# EAGLE board CortexM0_M3_BoB_1v (EAGLE 5.11)
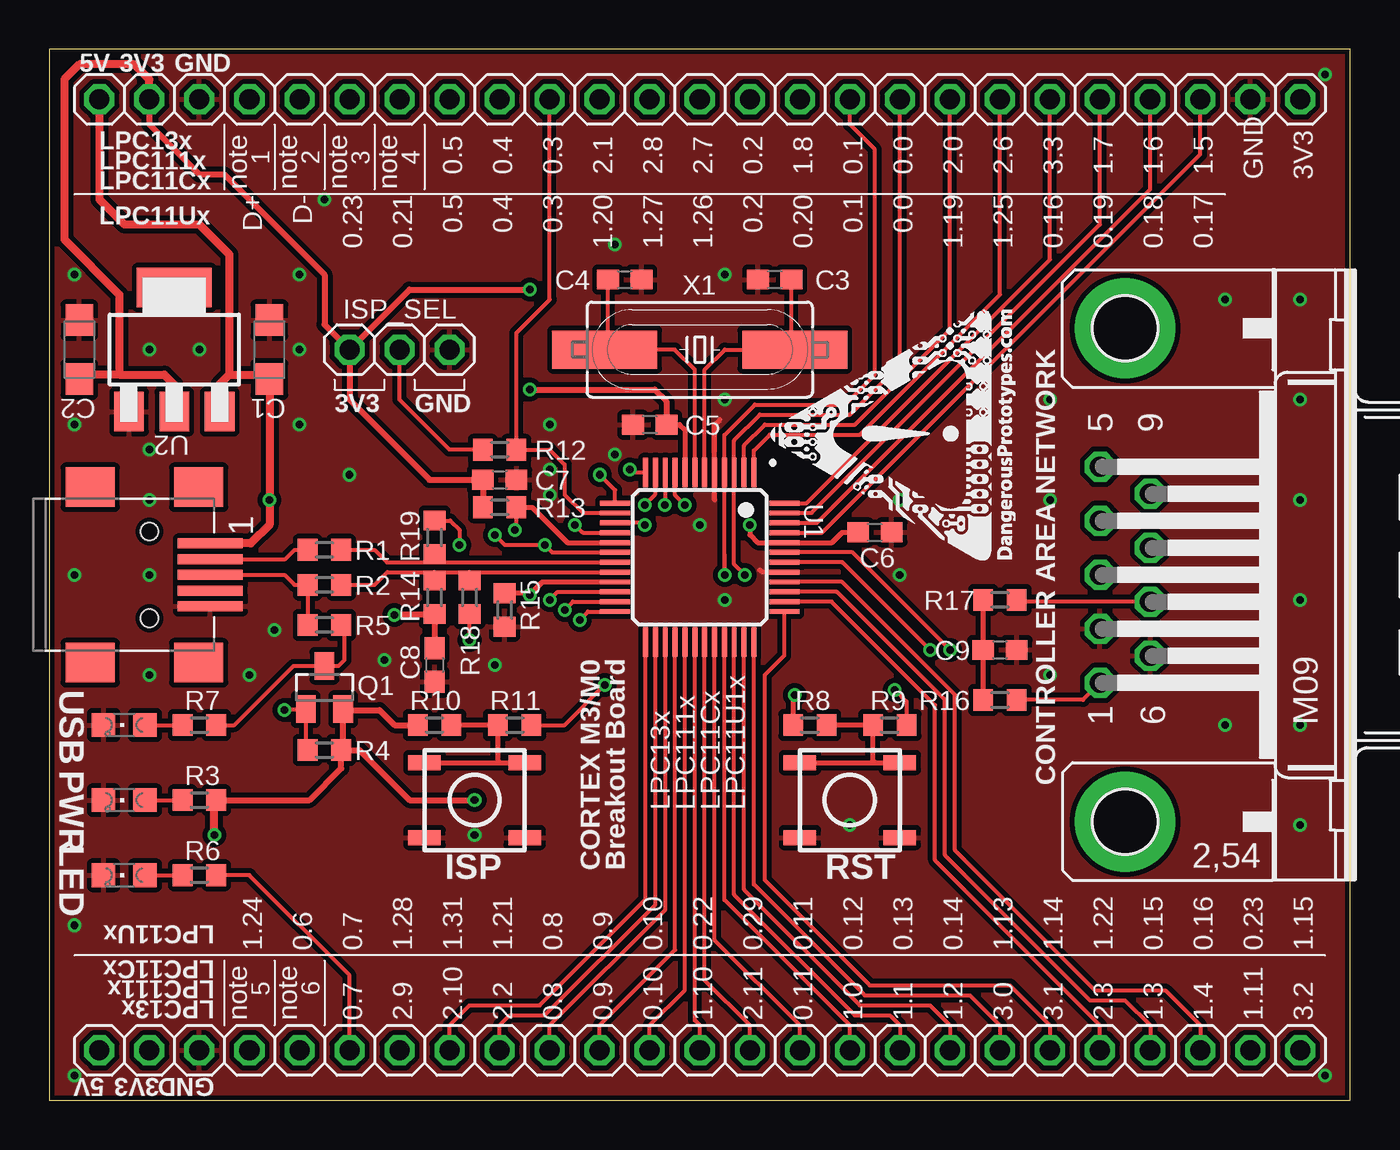
[diagram p0: board, top side]
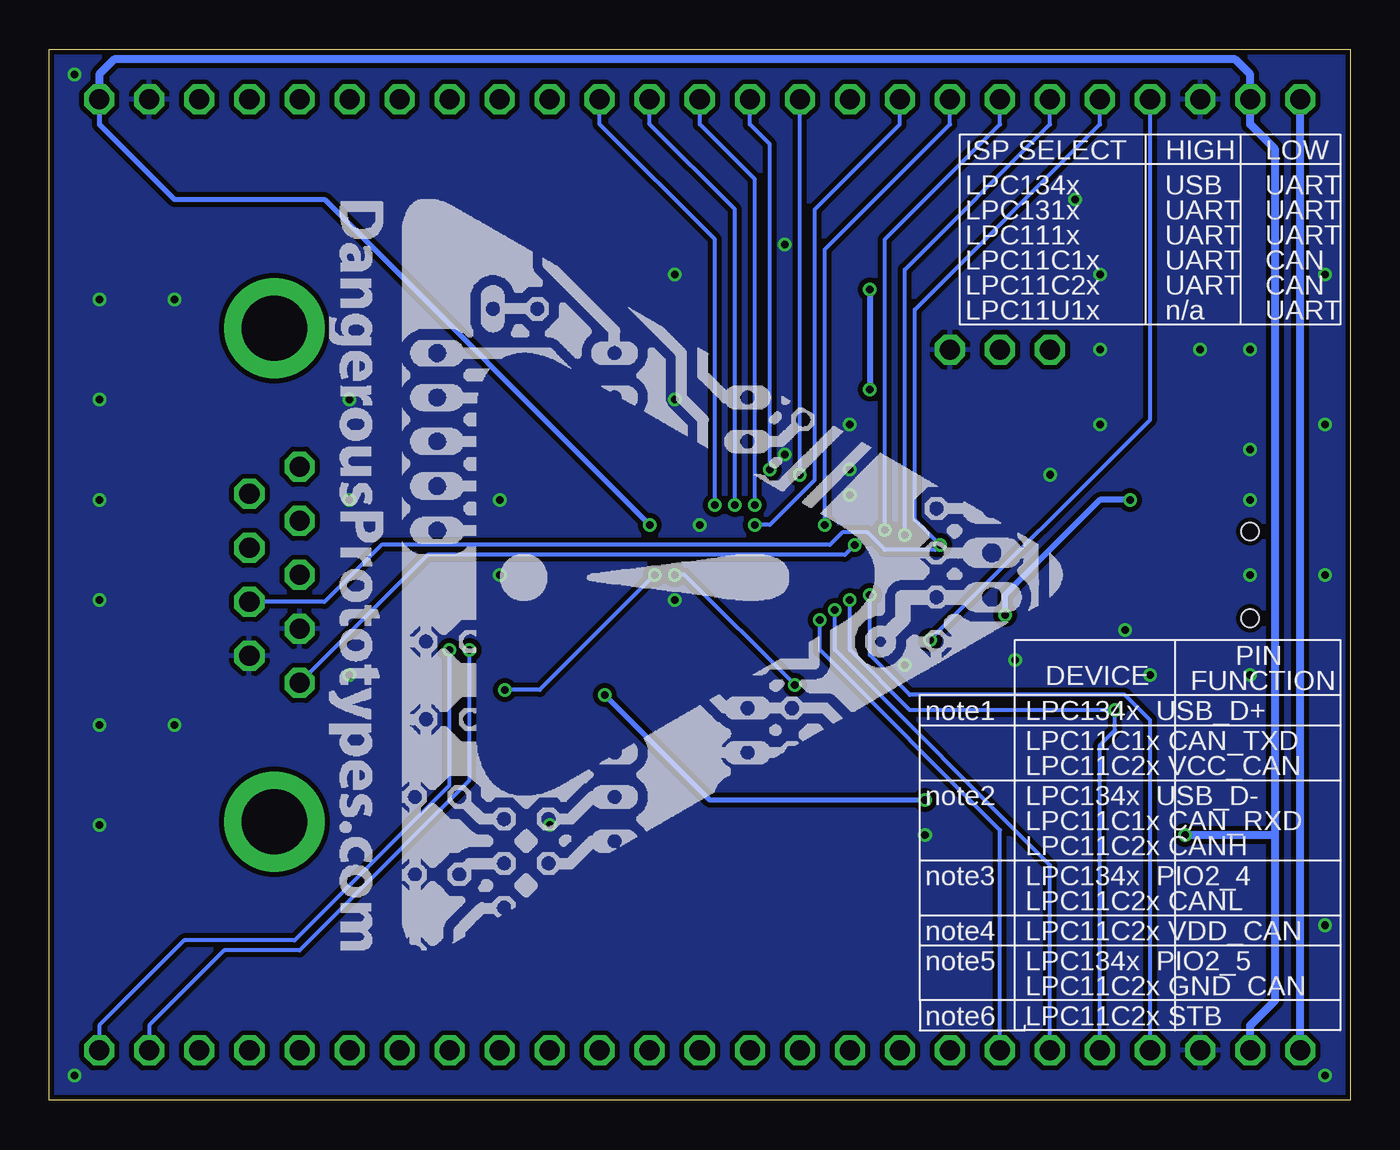
[diagram p1: board, bottom side, seen from below]

Size 66.04 x 53.34 mm. Coordinates in mm from the lower left corner, seen from the top.
Outline: 0,0 66.04,0 66.04,53.34 0,53.34 0,0
Copper layers (1*16): Top 0.035mm / dielectric 1.5mm / Bottom 0.035mm
Design rules "Fusion_eagle_rule_v1.1": minimum track width 6mil, minimum drill 12mil, track to track 6mil, track to pad 6mil, pad to pad 6mil, via to via 6mil, smd to smd 0mil, copper to edge 10mil, drill to drill 10mil, minimum pad ring 10mil, minimum via ring 6mil, stop-mask expansion 2mil, vias tented up to drill 100mil, thermal gap 10mil

## Footprints (pad centres in the part's own frame; a part is rotated, then mirrored left to right if it is on the bottom)
SMC_A = smd 1.6 x 1.4: + -1.5,0; - 1.5,0
C603 = smd 1.1 x 1: 1 -0.85,0; 2 0.85,0
M09HP = drill 1.016 octagon: 1 -5.486,1.27; 2 -2.743,1.27; 3 0,1.27; 4 2.743,1.27; 5 5.486,1.27; 6 -4.115,-1.27; 7 -1.372,-1.27; 8 1.372,-1.27; 9 4.115,-1.27 | drill 3.302 pad 5.08 round: G1 -12.522,0; G2 12.522,0
TACT_SWITCH_SMALL = smd 1.651 x 0.762: 1 -2.54,1.905; 2 2.54,1.905; 3 -2.54,-1.905; 4 2.54,-1.905
1X03 = drill 1.016 octagon: 1 -2.54,0; 2 0,0; 3 2.54,0
1X25 = drill 1.016 octagon: 1 -29.21,0; 2 -26.67,0; 3 -24.13,0; 4 -21.59,0; 5 -19.05,0; 6 -16.51,0; 7 -13.97,0; 8 -11.43,0; 9 -8.89,0; 10 -6.35,0; 11 -3.81,0; 12 -1.27,0; 13 1.27,0; 14 3.81,0; 15 6.35,0; 16 8.89,0; 17 11.43,0; 18 13.97,0; 19 16.51,0; 20 19.05,0; 21 21.59,0; 22 24.13,0; 23 26.67,0; 24 29.21,0; 25 31.75,0
LED-805 = smd 1.2 x 1.2: A 0,-1.05; C 0,1.05
SOT23 = smd 1 x 1.4: 1 -0.95,-1.1; 2 0.95,-1.1; 3 0,1.1
R603 = smd 1 x 1.1: 1 -0.85,0; 2 0.85,0
LQFP48 = smd 1.5 x 0.25: 1 -4.3,2.75; 2 -4.3,2.25; 3 -4.3,1.75; 4 -4.3,1.25; 5 -4.3,0.75; 6 -4.3,0.25; 7 -4.3,-0.25; 8 -4.3,-0.75; 9 -4.3,-1.25; 10 -4.3,-1.75; 11 -4.3,-2.25; 12 -4.3,-2.75; 25 4.3,-2.75; 26 4.3,-2.25; 27 4.3,-1.75; 28 4.3,-1.25; 29 4.3,-0.75; 30 4.3,-0.25; 31 4.3,0.25; 32 4.3,0.75; 33 4.3,1.25; 34 4.3,1.75; 35 4.3,2.25; 36 4.3,2.75 | smd 0.25 x 1.5: 13 -2.75,-4.3; 14 -2.25,-4.3; 15 -1.75,-4.3; 16 -1.25,-4.3; 17 -0.75,-4.3; 18 -0.25,-4.3; 19 0.25,-4.3; 20 0.75,-4.3; 21 1.25,-4.3; 22 1.75,-4.3; 23 2.25,-4.3; 24 2.75,-4.3; 37 2.75,4.3; 38 2.25,4.3; 39 1.75,4.3; 40 1.25,4.3; 41 0.75,4.3; 42 0.25,4.3; 43 -0.25,4.3; 44 -0.75,4.3; 45 -1.25,4.3; 46 -1.75,4.3; 47 -2.25,4.3; 48 -2.75,4.3
SOT223 = smd 1.5 x 2: 1 -2.3,-3.15; 2 0,-3.15; 3 2.3,-3.15 | smd 3.8 x 2: 4 0,3.15
CONN_USB_MINI-B = smd 2 x 2.5: BODY@1 -4.45,2.5; BODY@2 4.45,2.5; BODY@3 4.45,-3; BODY@4 -4.45,-3 | smd 0.5 x 3.3: D+ 0,3.1; D- -0.8,3.1; GND 1.6,3.1; ID 0.8,3.1; VUSB -1.6,3.1 | hole 0.9: -2.2,0; 2.2,0
HC-49U = smd 5.334 x 1.93: 1 -4.826,0; 2 4.826,0

## Placement (x,y rotation side)
C1  10uF  [SMC_A]  11.18,38.1 90 top
C2  10uF  [SMC_A]  1.52,38.1 90 top
C3  16pF  [C603]  36.83,41.66 180 top
C4  16pF  [C603]  29.21,41.66 0 top
C5  0.1uF  [C603]  30.48,34.29 180 top
C6  0.1uF  [C603]  41.91,28.83 0 top
C7  0.1uF  [C603]  22.86,31.5 0 top
C8  0.1uF  [C603]  19.56,22.1 270 top
C9  1nF  [C603]  48.26,22.86 0 top
CAN  [M09HP]  54.61,26.67 90 top
ISP  [TACT_SWITCH_SMALL]  21.59,15.24 180 top
ISP_SEL  [1X03]  17.78,38.1 180 top
JP2  [1X25]  31.75,2.54 0 top
JP3  [1X25]  31.75,50.8 0 top
LED  [LED-805]  3.81,11.43 90 top
PWR  [LED-805]  3.81,15.24 90 top
Q1  [SOT23]  13.97,20.96 0 top
R1  33  [R603]  13.97,27.94 0 top
R2  33  [R603]  13.97,26.16 0 top
R3  1k  [R603]  7.62,15.24 180 top
R4  10k  [R603]  13.97,17.78 180 top
R5  1.5k  [R603]  13.97,24.13 180 top
R6  1k  [R603]  7.62,11.43 0 top
R7  1k  [R603]  7.62,19.05 0 top
R8  22K  [R603]  38.61,19.05 180 top
R9  1k  [R603]  42.67,19.05 0 top
R10  22K  [R603]  19.56,19.05 180 top
R11  1k  [R603]  23.62,19.05 0 top
R12  10k  [R603]  22.86,33.02 0 top
R13  0R  [R603]  22.86,30.1 0 top
R14  0R  [R603]  19.56,25.53 90 top
R15  0R  [R603]  23.11,24.89 90 top
R16  60R  [R603]  48.26,20.32 0 top
R17  60R  [R603]  48.26,25.4 0 top
R18  0R  [R603]  21.34,25.53 90 top
R19  0R  [R603]  19.56,28.57 270 top
RST  [TACT_SWITCH_SMALL]  40.64,15.24 180 top
U1  LPC1XXX  [LQFP48]  33.02,27.56 270 top
U2  [SOT223]  6.35,38.1 0 top
U$2  DP_LOGO0.5X0.5  [DP_LOGO_ART_0.5X0.5]  49.02,27.43 90 top
U$7  DP_LOGO1.5X1.5  [DP_LOGO_ART_1.5X1.5]  51.82,45.72 270 bottom
USB  [LED-805]  3.81,19.05 90 top
USB1  CON-USB-MINI-BUSB1  [CONN_USB_MINI-B]  5.08,26.67 270 top
X1  12MHz  [HC-49U]  33.02,38.1 180 top

## Library data of the parts
C1-C9 ISP LED PWR Q1 R1-R19 RST U1 U2 U$2 U$7 USB USB1 X1 = dp_devices
CAN = con-subd; OC_FARNELL: unknown; OC_NEWARK: unknown
ISP_SEL JP2 JP3 = pinhead

## Nets
+3V3: C2.+ C5.1 C6.1 C7.1 ISP_SEL.3 JP2.2 JP3.2 JP3.25 Q1.2 R3.1 R4.1 R8.2 R10.2 R13.1 U1.8 U1.44 U2.2
+5V: C1.+ C8.1 JP2.1 JP3.1 R14.1 U2.3 USB1.VUSB
D+: R2.2 R14.2 R18.2 U1.20
D-: R1.2 R19.2 U1.19
GND: C1.- C2.- C3.2 C4.2 C5.2 C6.2 C7.2 C8.2 C9.2 CAN.2 CAN.6 ISP.1 ISP.2 ISP_SEL.1 JP2.3 JP3.3 JP3.24 LED.C PWR.C R15.1 RST.1 RST.2 U1.5 U1.41 U2.1 USB1.GND USB.C
N$1: LED.A R6.1
N$2: R1.1 USB1.D-
N$3: R2.1 R5.2 USB1.D+
N$4: PWR.A R3.2
N$5: R8.1 R9.1 RST.3 RST.4
N$6: Q1.3 R5.1 R7.2
N$7: R7.1 USB.A
N$8: ISP.3 ISP.4 R10.1 R11.1
N$9: ISP_SEL.2 R12.1
N$13: C9.1 R16.1 R17.1
PIO0_0: JP3.17 R9.2 U1.3
PIO0_1: JP3.16 R11.2 U1.4
PIO0_2: JP3.14 U1.10
PIO0_3: JP3.10 R12.2 U1.14
PIO0_4: JP3.9 U1.15
PIO0_5: JP3.8 U1.16
PIO0_6: JP2.5 Q1.1 R4.2 U1.22
PIO0_7: JP2.6 R6.2 U1.23
PIO0_8: JP2.10 U1.27
PIO0_9: JP2.11 U1.28
PIO0_10: JP2.12 U1.29
PIO0_11: JP2.15 U1.32
PIO1_0: JP2.16 U1.33
PIO1_1: JP2.17 U1.34
PIO1_2: JP2.18 U1.35
PIO1_3: JP2.22 U1.39
PIO1_4: JP2.23 U1.40
PIO1_5: JP3.23 U1.45
PIO1_6: JP3.22 U1.46
PIO1_7: JP3.21 U1.47
PIO1_8: JP3.15 U1.9
PIO1_9: JP3.7 R13.2 U1.17
PIO1_10: JP2.13 U1.30
PIO1_11: JP2.24 U1.42
PIO2_0: JP3.18 U1.2
PIO2_1: JP3.11 U1.13
PIO2_2: JP2.9 U1.26
PIO2_3: JP2.21 U1.38
PIO2_4: CAN.7 JP3.5 R17.2 R19.1
PIO2_5: JP3.4 R18.1
PIO2_6: JP3.19 U1.1
PIO2_7: JP3.13 U1.11
PIO2_8: JP3.12 U1.12
PIO2_9: JP2.7 U1.24
PIO2_10: JP2.8 U1.25
PIO2_11: JP2.14 U1.31
PIO3_0: JP2.19 U1.36
PIO3_1: JP2.20 U1.37
PIO3_2: JP2.25 U1.43
PIO3_3: JP3.20 U1.48
PIO3_4: CAN.1 JP3.6 R16.2 U1.18
PIO3_5: JP2.4 R15.2 U1.21
XTAL1: C3.1 U1.6 X1.1
XTAL2: C4.1 U1.7 X1.2

## Tracks (layer width: path | path; a pad name or v marks a point on that pad's centre or on a via)
+3V3  (via drill 0.38)
  Top 0.254: C5.1 32,34.29 32.27,34.02 U1.8 | C6.1 40.26,28.83 39.74,28.31 U1.44 35.95,28.31 35.56,28.7 v35.56,29.21 | R8.2 37.76,20.49 v37.85,20.57
  Top 0.305: R4.1 14.92,17.88 Q1.2 14.96,19.81 16.76,19.81 17.53,19.05 R10.2 | R4.1 14.82,16.85 13.21,15.24 R3.1 | R13.1 C7.1 19.3,31.5 15.24,35.56 ISP_SEL.3 | JP3.2 5.08,49.53 7.62,46.99 8.89,46.99 13.97,41.91 13.97,39.37 ISP_SEL.3 | C5.1 31.33,35.47 30.73,36.07 v24.38,36.07 | v24.38,41.15 18.29,41.15 ISP_SEL.3 | R4.1 15.75,17.78 18.29,15.24 v21.59,15.24
  Top 0.406: U2.2 6.35,36.32 5.84,36.83 3.56,36.83 | C2.+ 2.01,36.83 3.56,36.83 | 3.56,36.83 3.56,40.89 0.76,43.69 0.76,51.82 1.52,52.58 4.32,52.58 5.08,51.82 JP3.2 | v8.38,13.46 8.38,15.15 R3.1
  Bottom 0.254: v35.56,29.21 52.07,45.72 59.69,45.72 63.5,49.53 JP3.25 | v37.85,20.57 32.51,15.24 v21.59,15.24
  Bottom 0.305: v24.38,41.15 v24.38,36.07
  Bottom 0.406: 3.81,13.46 3.81,5.08 5.08,3.81 JP2.2 | 3.81,13.46 3.81,48.26 5.08,49.53 JP3.2 5.08,52.07 5.84,52.83 62.74,52.83 63.5,52.07 JP3.25 | 3.81,13.46 v8.38,13.46
+5V  (via drill 0.38)
  Top 0.305: C8.1 R14.1 17.57,24.68 v17.53,24.64
  Top 0.406: USB1.VUSB 10.24,28.27 11.18,29.21 v11.18,30.48 C1.+ 10.69,36.83 9.14,36.83 | U2.3 8.65,36.34 9.14,36.83 | 9.14,36.83 9.14,42.93 7.62,44.45 3.81,44.45 2.54,45.72 JP3.1
  Bottom 0.305: v17.53,24.64 17.53,25.65 12.7,30.48 v11.18,30.48
  Bottom 0.406: JP2.1 JP3.1
D+
  Top 0.203: R2.2 16.51,26.16 17.16,26.81 19.56,26.81 | 19.56,26.81 21.34,26.81 | 21.34,26.81 U1.20 | 19.56,26.81 R14.2 | 21.34,26.81 R18.2
D-
  Top 0.203: 19.56,27.31 17.14,27.31 16.51,27.94 R1.2 | 19.56,27.31 U1.19 | 19.56,27.31 R19.2
GND  (via drill 0.38)
  Top 0.254: U1.41 36.18,26.81 36.07,26.92 | 33.78,30.48 33.77,30.49 U1.5 33.77,34.28 34.04,34.54
  other vias: 25.4,32 25.4,30.73 1.27,1.27 64.77,1.27 64.77,52.07 28.7,32.77 25.4,34.29 1.27,41.91 1.27,34.29 5.08,38.1 7.62,38.1 5.08,33.02 5.08,30.48 5.08,26.67 5.08,21.59 10.16,21.59 11.43,23.88 1.27,26.67 12.7,38.1 12.7,34.29 12.7,41.91 15.24,31.75 13.97,45.72 21.59,13.46 40.64,13.97 34.29,35.56 33.02,29.21 34.29,41.91 28.7,43.43 43.18,26.67 43.18,30.48 50.8,21.59 34.29,25.4 1.27,8.89 22.61,22.1 17.02,22.35 50.8,35.56 50.8,30.48 59.69,40.64 59.69,19.05 63.5,13.97 63.5,19.05 63.5,25.4 63.5,30.48 63.5,35.56 63.5,40.64
  pour Bottom (isolate 0.254): 0,53.34 66.04,53.34 66.04,0 0,0
  pour Top (isolate 0.254): 0,53.34 0,0 66.04,0 66.04,53.34
N$1
  Top 0.203: LED.A R6.1
N$2
  Top 0.203: USB1.D- 11.98,27.47 12.45,27.94 R1.1
N$3
  Top 0.203: USB1.D+ 11.94,26.67 12.45,26.16 R2.1 R5.2
N$4
  Top 0.203: PWR.A R3.2
N$5
  Top 0.254: R8.1 R9.1 41.82,17.23 41.91,17.14 | RST.4 41.91,17.14 | 41.91,17.14 RST.3
N$6
  Top 0.203: R7.2 9.4,19.05 12.4,22.05 Q1.3 14.69,22.05 14.99,22.35 14.99,23.96 R5.1
N$7
  Top 0.203: USB.A R7.1
N$8
  Top 0.254: R10.1 R11.1 22.77,17.23 22.86,17.14 | ISP.4 22.86,17.14 | 22.86,17.14 ISP.3
N$9
  Top 0.203: ISP_SEL.2 17.78,35.56 20.32,33.02 R12.1
N$13
  Top 0.254: R17.1 C9.1 R16.1
PIO0_0  (via drill 0.38)
  Top 0.203: JP3.17 43.18,37.34 40.64,34.8 36.07,34.8 34.77,33.5 U1.3 34.77,27.21 v35.31,26.67 | R9.2 43.52,20.23 v42.93,20.83
  Bottom 0.203: v42.93,20.83 41.15,20.83 v35.31,26.67
PIO0_1  (via drill 0.38)
  Top 0.203: 34.27,27.69 34.27,26.69 v34.29,26.67 34.29,27.67 34.27,27.69 | 34.27,27.69 U1.4 34.27,33.76 35.81,35.31 40.39,35.31 41.91,36.83 41.91,48.26 40.64,49.53 JP3.16 | R11.2 26.16,19.05 v28.19,21.08
  Bottom 0.203: v28.19,21.08 33.78,26.67 v34.29,26.67
PIO0_2  (via drill 0.38)
  Top 0.203: U1.10 31.27,30.25 v31.24,30.23
  Bottom 0.203: v31.24,30.23 31.24,45.21 35.56,49.53 JP3.14
PIO0_3
  Top 0.203: U1.14 27.09,29.81 26.16,30.73 26.16,32.26 25.4,33.02 R12.2 23.71,38.95 25.4,40.64 JP3.10
PIO0_4  (via drill 0.38)
  Top 0.203: U1.15 30.13,29.31 v30.23,29.21
  Bottom 0.203: JP3.9 22.86,49.53 27.18,45.21 27.18,31.5 29.46,29.21 v30.23,29.21
PIO0_5  (via drill 0.38)
  Top 0.203: U1.16 27.07,28.81 v26.67,29.21
  Bottom 0.203: JP3.8 20.32,49.53 26.67,43.18 v26.67,29.21
PIO0_6  (via drill 0.38)
  Top 0.203: R4.2 13.02,17.88 Q1.1 11.98,19.86 v11.94,19.81 | v25.4,25.4 25.81,25.81 U1.22
  Bottom 0.203: v25.4,25.4 25.4,22.86 22.35,19.81 v11.94,19.81 11.94,18.8 12.7,18.03 JP2.5
PIO0_7  (via drill 0.38)
  Top 0.203: U1.23 26.58,25.31 v26.16,24.89 | R6.2 10.16,11.43 15.24,6.35 JP2.6
  Bottom 0.203: v26.16,24.89 26.16,22.86 15.24,11.94 JP2.6
PIO0_8
  Top 0.203: U1.27 31.27,9.68 25.4,3.81 JP2.10
PIO0_9
  Top 0.203: U1.28 31.77,7.64 27.94,3.81 JP2.11
PIO0_10
  Top 0.203: U1.29 32.27,5.6 30.48,3.81 JP2.12
PIO0_11
  Top 0.203: U1.32 33.77,8.14 38.1,3.81 JP2.15
PIO1_0
  Top 0.203: U1.33 34.27,10.18 40.64,3.81 JP2.16
PIO1_1
  Top 0.203: U1.34 34.77,10.44 40.89,4.32 42.67,4.32 43.18,3.81 JP2.17
PIO1_2
  Top 0.203: U1.35 35.27,10.7 41.15,4.83 44.7,4.83 45.72,3.81 JP2.18
PIO1_3
  Top 0.203: U1.39 39.98,25.81 45.47,20.32 45.47,12.45 52.83,5.08 54.61,5.08 55.88,3.81 JP2.22
PIO1_4
  Top 0.203: U1.40 40.24,26.31 45.97,20.57 45.97,12.7 53.09,5.59 56.64,5.59 58.42,3.81 JP2.23
PIO1_5
  Top 0.203: U1.45 39.22,28.81 58.42,48.01 JP3.23
PIO1_6
  Top 0.203: U1.46 38.96,29.31 55.88,46.23 JP3.22
PIO1_7
  Top 0.203: U1.47 38.7,29.81 53.34,44.45 JP3.21
PIO1_8  (via drill 0.38)
  Top 0.203: U1.9 31.77,30.71 v32.26,30.23
  Bottom 0.203: v32.26,30.23 32.26,43.69 38.1,49.53 | 38.1,49.53 JP3.15 38.1,49.53
PIO1_9  (via drill 0.38)
  Top 0.203: v23.62,28.96 23.71,29.04 R13.2
  Top 0.254: U1.17 26.3,28.31 24.51,30.1 R13.2
  Bottom 0.203: JP3.7 17.78,49.53 23.62,43.69 v23.62,28.96
PIO1_10
  Top 0.203: U1.30 32.77,4.06 33.02,3.81 JP2.13
PIO1_11  (via drill 0.38)
  Top 0.203: U1.42 40.26,27.31 v44.7,22.86
  Bottom 0.203: v44.7,22.86 44.7,16.26 53.34,7.62 57.15,7.62 60.96,3.81 JP2.24
PIO2_0
  Top 0.203: U1.2 35.27,33.24 36.32,34.29 40.89,34.29 45.72,39.12 JP3.18
PIO2_1  (via drill 0.38)
  Top 0.203: U1.13 28.72,30.97 v27.94,31.75
  Bottom 0.203: v27.94,31.75 JP3.11
PIO2_2
  Top 0.203: U1.26 30.77,9.94 25.15,4.32 23.37,4.32 22.86,3.81 JP2.9
PIO2_3
  Top 0.203: U1.38 39.72,25.31 44.96,20.07 44.96,12.19 53.34,3.81 JP2.21
PIO2_4  (via drill 0.38)
  Top 0.203: CAN.7 49.21,25.3 R17.2 | v20.83,28.19 20.83,28.96 20.36,29.43 R19.1
  Bottom 0.203: JP3.5 12.7,49.53 22.1,40.13 22.1,29.46 v20.83,28.19 21.08,27.94 23.62,27.94 24.51,28.83 25.78,28.83 26.42,28.19 49.17,28.19 52.07,25.3 CAN.7
PIO2_5  (via drill 0.38)
  Top 0.203: v21.34,23.37 R18.1
  Bottom 0.203: JP3.4 10.16,34.54 v21.34,23.37
PIO2_6
  Top 0.203: U1.1 35.77,32.98 36.58,33.78 41.15,33.78 48.26,40.89 JP3.19
PIO2_7  (via drill 0.38)
  Top 0.203: U1.11 30.77,30.77 v30.23,30.23
  Bottom 0.203: v30.23,30.23 30.23,46.74 33.02,49.53 JP3.13
PIO2_8  (via drill 0.38)
  Top 0.203: U1.12 29.61,31.86 v29.46,32
  Bottom 0.203: v29.46,32 29.46,48.51 30.48,49.53 JP3.12
PIO2_9  (via drill 0.38)
  Top 0.203: U1.24 27.35,24.81 v26.92,24.38
  Bottom 0.203: v26.92,24.38 26.92,22.86 17.78,13.72 JP2.7
PIO2_10
  Top 0.203: U1.25 30.27,10.2 24.89,4.83 21.34,4.83 20.32,3.81 JP2.8
PIO2_11
  Top 0.203: U1.31 33.27,6.1 35.56,3.81 JP2.14
PIO3_0
  Top 0.203: U1.36 35.77,10.97 41.4,5.33 46.74,5.33 48.26,3.81 JP2.19
PIO3_1
  Top 0.203: U1.37 37.32,22.59 36.32,21.59 36.32,11.18 41.66,5.84 48.77,5.84 50.8,3.81 JP2.20
PIO3_2  (via drill 0.38)
  Top 0.203: U1.43 40.77,27.81 v45.72,22.86
  Bottom 0.203: v45.72,22.86 45.72,16 53.59,8.13 59.18,8.13 63.5,3.81 JP2.25
PIO3_3
  Top 0.203: U1.48 38.44,30.31 50.8,42.67 JP3.20
PIO3_4  (via drill 0.38)
  Top 0.203: R16.2 52.48,20.32 CAN.1 | U1.18 25.53,27.81 v25.15,28.19 23.11,28.19 v22.61,28.7
  Bottom 0.203: JP3.6 15.24,49.53 22.61,42.16 v22.61,28.7 | v25.15,28.19 25.65,27.69 46.84,27.69 CAN.1
PIO3_5  (via drill 0.38)
  Top 0.254: R15.2 24.3,25.74 v24.38,25.65 25.04,26.31 U1.21
  Bottom 0.203: JP2.4 10.16,19.3 11.43,20.57 22.35,20.57 24.38,22.61 v24.38,25.65
XTAL1
  Top 0.203: U1.6 33.27,37.08 34.29,38.1 X1.1 37.68,38.27 C3.1
XTAL2
  Top 0.203: U1.7 32.77,37.08 31.75,38.1 X1.2 28.36,38.27 C4.1

## Text on the board
tNames: 5V | 3V3 | GND | LPC13x | LPC111x | 1 | 2 | 3 | 4 | 0.5 | 0.4 | 0.3 | 2.1 | 2.8 | 2.7 | 0.2 | 1.8 | 0.1 | 0.0 | 2.0 | 2.6 | 3.3 | 1.7 | 1.6 | 1.5 | GND | 3V3 | LPC11Cx | D+ | note | D- | note | 0.23 | note | 0.21 | note | 0.5 | 0.4 | 0.3 | 1.20 | 1.27 | 1.26 | 0.2 | 0.20 | 0.1 | 0.0 | 1.19 | 1.25 | 0.16 | 0.19 | 0.18 | 0.17 | LPC11Ux | 3V3 | GND | CONTROLLER AREA NETWORK | LPC13x | LPC111x | LPC11Cx | LPC11U1x | CORTEX M3/M0 | Breakout Board | LPC11Ux | 1.24 | 0.6 | 0.7 | 1.28 | 1.31 | 1.21 | 0.8 | 0.9 | 0.10 | 0.22 | 0.29 | 0.11 | 0.12 | 0.13 | 0.14 | 1.13 | 1.14 | 1.22 | 0.15 | 0.16 | 0.23 | 1.15 | LPC11Cx | LPC111x | 5 | 6 | LPC13x | note | note | 0.7 | 2.9 | 2.10 | 2.2 | 0.8 | 0.9 | 0.10 | 1.10 | 2.11 | 0.11 | 1.0 | 1.1 | 1.2 | 3.0 | 3.1 | 2.3 | 1.3 | 1.4 | 1.11 | 3.2 | 5V | 3V3 | GND
bNames: LOW | HIGH | ISP SELECT | UART | USB | LPC134x | UART | UART | LPC131x | UART | UART | LPC111x | CAN | UART | LPC11C1x | CAN | UART | LPC11C2x | UART | n/a | LPC11U1x | PIN | FUNCTION | DEVICE | LPC134x USB_D+ | note1 | LPC11C1x CAN_TXD | LPC11C2x VCC_CAN | LPC134x USB_D- | note2 | LPC11C1x CAN_RXD | LPC11C2x CANH | LPC134x PIO2_4 | note3 | LPC11C2x CANL | LPC11C2x VDD_CAN | note4 | LPC134x PIO2_5 | note5 | LPC11C2x GND_CAN | LPC11C2x STB | note6